# EAGLE board femtoBeacon_dongle_r2.0.3_PANELIZED (EAGLE 7.6.0)
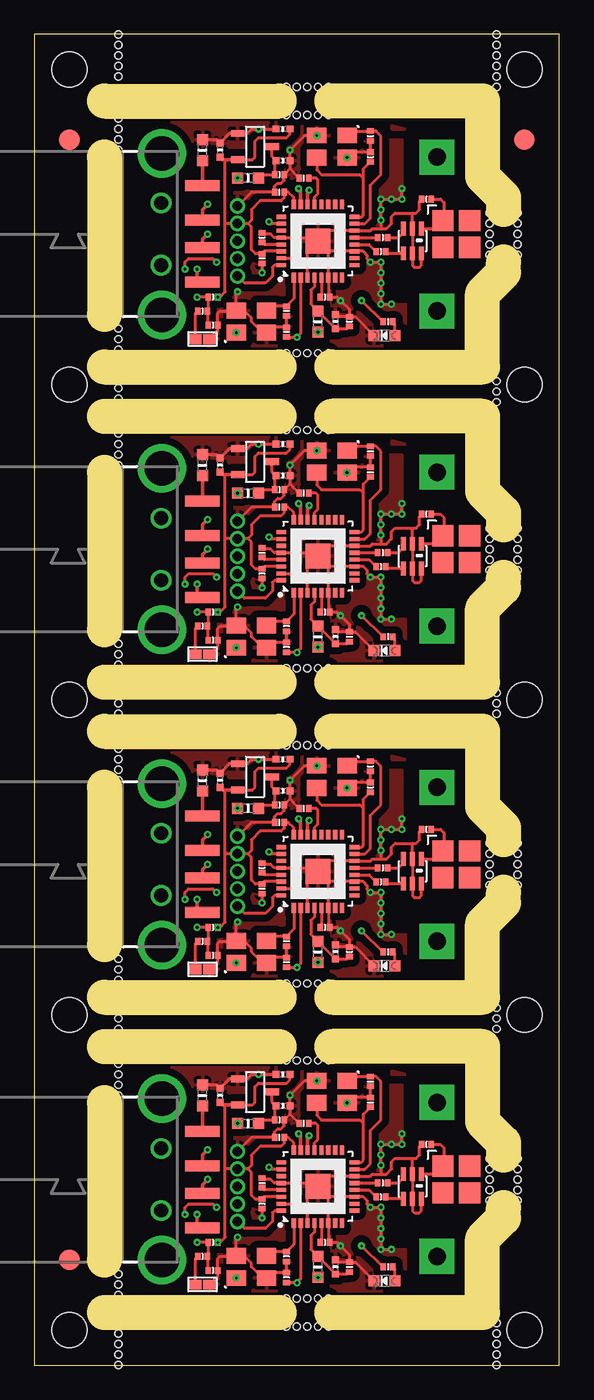
[diagram p0: board, top side]
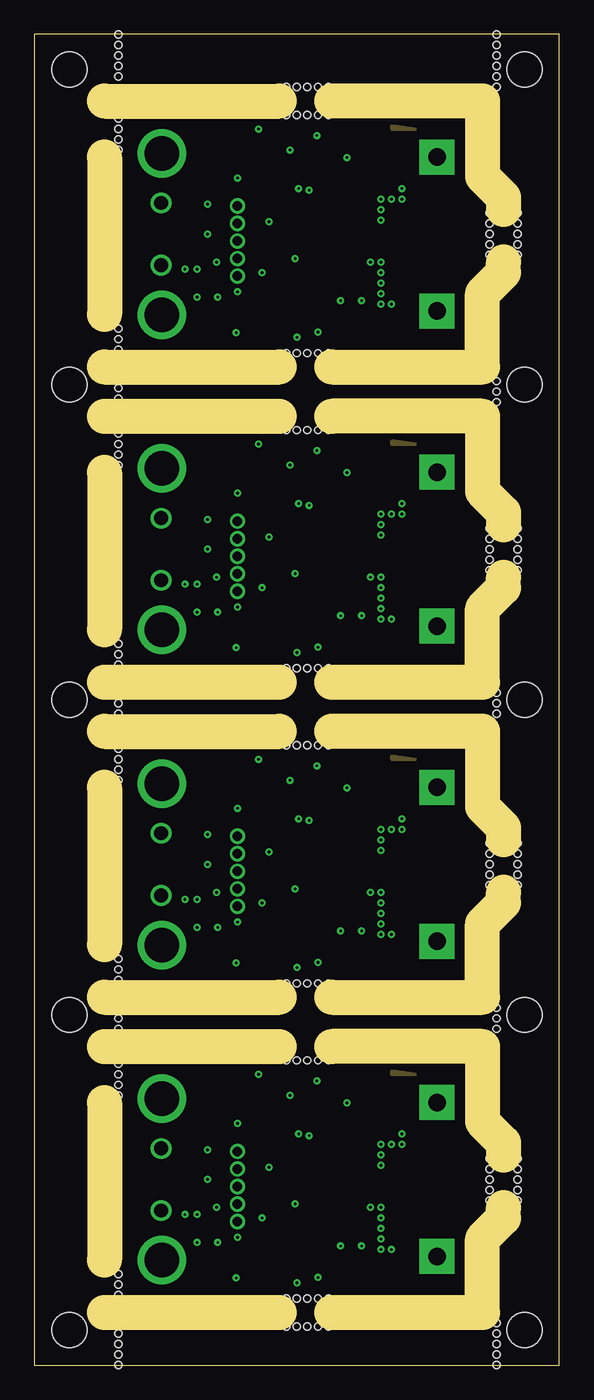
[diagram p1: board, inner layer Route2]
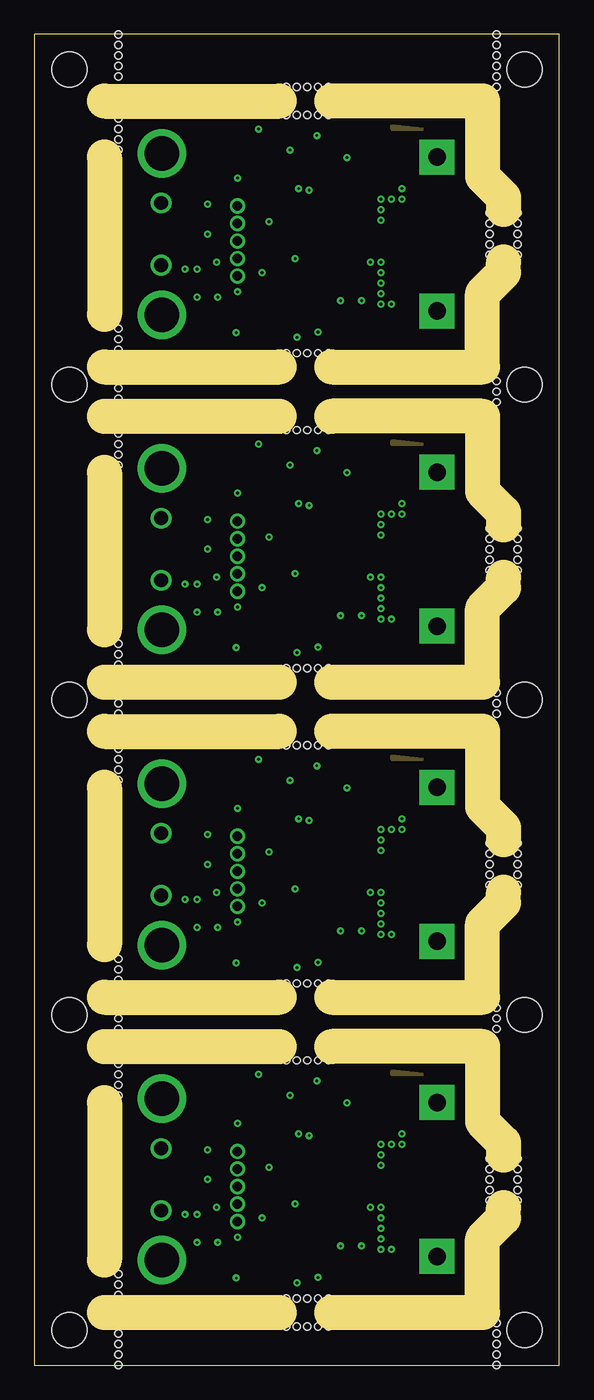
[diagram p2: board, inner layer Route15]
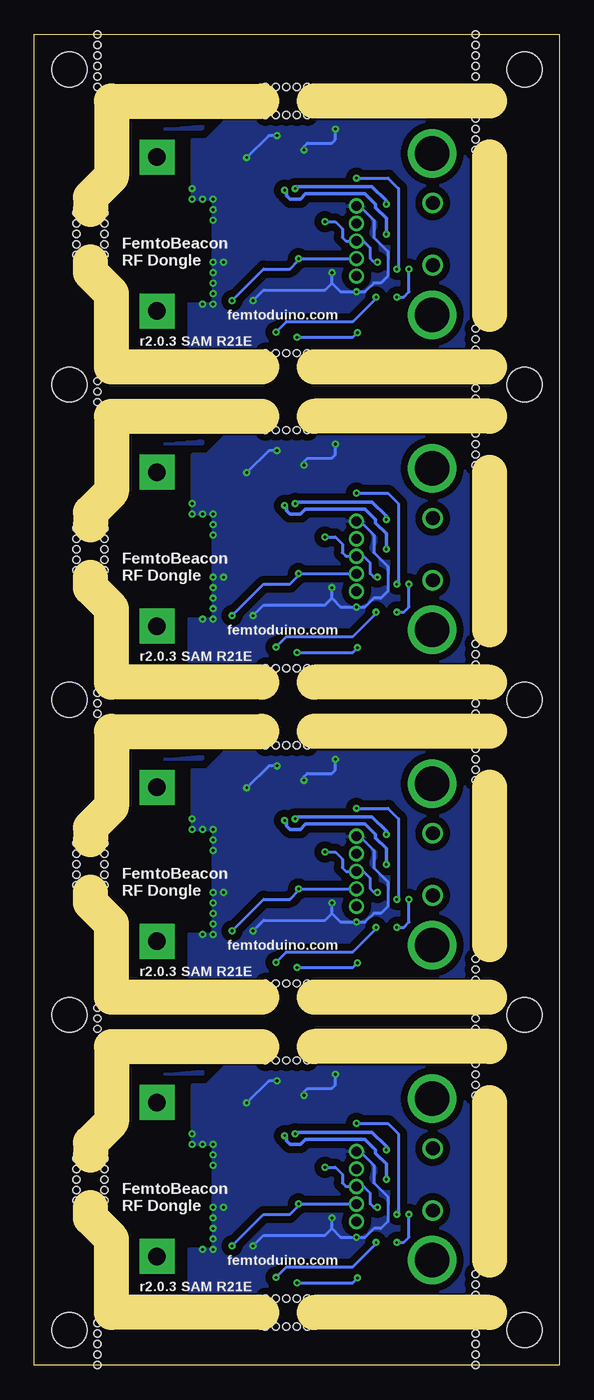
[diagram p3: board, bottom side, seen from below]

Size 38.1 x 96.52 mm. Coordinates in mm from the lower left corner, seen from the top.
Outline: 38.1,27.94 38.1,0 0,0 0,27.94
Outline: 38.1,22.86 38.1,50.8
Outline: 0,50.8 0,22.86
Outline: 38.1,45.72 38.1,73.66
Outline: 0,73.66 0,45.72
Outline: 38.1,68.58 38.1,96.52 0,96.52 0,68.58
Copper layers (1+2*15+16): Top 0.035mm / dielectric 1.5mm / Route2 0.035mm / dielectric 0.15mm / Route15 0.035mm / dielectric 0.2mm / Bottom 0.035mm
Design rules "femtoduino_5mil_4layer": minimum track width 5mil, minimum drill 5mil, track to track 5mil, track to pad 5mil, pad to pad 5mil, via to via 5mil, smd to smd 5mil, copper to edge 5mil, drill to drill 5mil, minimum pad ring 8mil, minimum via ring 5mil, stop-mask expansion 2mil, vias tented up to drill 30mil, thermal gap 10mil
Holes 2.54 mm at 2.54,2.54 2.54,25.4 35.56,25.4 35.56,2.54 2.54,25.4 2.54,48.26 35.56,48.26 35.56,25.4 2.54,48.26 2.54,71.12 35.56,71.12 35.56,48.26 2.54,71.12 2.54,93.98 35.56,93.98 35.56,71.12
Holes 0.51 mm at 6.1,21.84 6.1,21.08 6.1,20.32 6.1,19.56 6.1,5.08 6.1,5.84 6.1,6.6 19.81,4.83 19.05,4.83 18.29,4.83 20.57,4.83 21.34,4.83 33.02,13.46 33.02,14.22 33.02,14.99 33.02,12.7 33.02,11.94 35.05,13.46 35.05,14.22 35.05,12.7 35.05,11.94 35.05,14.99 19.81,2.79 19.05,2.79 18.29,2.79 20.57,2.79 21.34,2.79 19.81,22.1 19.05,22.1 18.29,22.1 20.57,22.1 21.34,22.1 33.53,3.05 33.53,0 33.53,0.76 33.53,1.52 33.53,2.29 6.1,27.94 6.1,0 6.1,0.76 6.1,1.52 6.1,2.29 6.1,44.7 6.1,43.94 6.1,43.18 6.1,42.42 6.1,27.94 6.1,28.7 6.1,29.46 19.81,27.69 19.05,27.69 18.29,27.69 20.57,27.69 21.34,27.69 33.02,36.32 33.02,37.08 33.02,37.85 33.02,35.56 33.02,34.8 35.05,36.32 35.05,37.08 35.05,35.56 35.05,34.8 35.05,37.85 19.81,44.96 19.05,44.96 18.29,44.96 20.57,44.96 21.34,44.96 33.53,25.91 33.53,24.38 33.53,25.15 6.1,50.8 6.1,24.38 6.1,25.15 6.1,67.56 6.1,66.8 6.1,66.04 6.1,65.28 6.1,50.8 6.1,51.56 6.1,52.32 19.81,50.55 19.05,50.55 18.29,50.55 20.57,50.55 21.34,50.55 33.02,59.18 33.02,59.94 33.02,60.71 33.02,58.42 33.02,57.66 35.05,59.18 35.05,59.94 35.05,58.42 35.05,57.66 35.05,60.71 19.81,67.82 19.05,67.82 18.29,67.82 20.57,67.82 21.34,67.82 33.53,69.85 33.53,70.61 33.53,71.37 33.53,48.77 33.53,47.24 33.53,48.01 6.1,73.66 6.1,47.24 6.1,48.01 6.1,90.42 6.1,89.66 6.1,88.9 6.1,88.14 6.1,73.66 6.1,74.42 6.1,75.18 19.81,73.41 19.05,73.41 18.29,73.41 20.57,73.41 21.34,73.41 33.02,82.04 33.02,82.8 33.02,83.57 33.02,81.28 33.02,80.52 35.05,82.04 35.05,82.8 35.05,81.28 35.05,80.52 35.05,83.57 19.81,90.68 19.05,90.68 18.29,90.68 20.57,90.68 21.34,90.68 19.81,92.71 19.05,92.71 18.29,92.71 20.57,92.71 21.34,92.71 33.53,92.71 33.53,93.47 33.53,94.23 33.53,95 33.53,95.76 33.53,96.52 6.1,93.47 6.1,94.23 6.1,95 6.1,95.76 6.1,96.52 6.1,70.1 6.1,70.87
Milling: 44 lines

## Footprints (pad centres in the part's own frame; a part is rotated, then mirrored left to right if it is on the bottom)
SPST_SMD = smd 0.889 x 0.699: 1 -0.508,0; 2 0.508,0
PART = smd 0.4 x 0.5: 1 -0.35,0; 2 0.35,0
_0402MP = smd 0.5 x 0.5: 1 -0.508,0; 2 0.508,0
USB_A-SMT = drill 2.5 pad 3.302: D1 -5.85,2.958; D2 5.85,2.958 | drill 1: D3 -2.25,3; D4 2.25,3 | smd 0.8 x 2.5: D+ 1,0; D- -1,0; GND 3.5,0; VBUS -3.5,0
_0603MP = smd 0.8 x 0.8: 1 -0.762,0; 2 0.762,0
FIDUCIAL_1MM = smd 1.5 x 1.5: 1 0,0
MCP1700T-3302E/TT = smd 0.5 x 1: GND -0.95,-1.25; VIN 0,1.25; VOUT 0.95,-1.25
CHIPLED_0603_NOOUTLINE = smd 0.8 x 0.8: A 0,-0.75; C 0,0.75
1X5_ROUND = drill 0.7 pad 1: P$1 0,0; P$2 0,-1.27; P$3 0,-2.54; P$4 0,-3.81; P$5 0,-5.08
0805_BALUN = smd 1 x 0.35: 1 -0.9,0.65; 2 -0.9,0; 3 -0.9,-0.65; 4 0.9,-0.65; 5 0.9,0; 6 0.9,0.65
QFN32 = smd 0.7 x 0.3: 1 -2.65,1.75; 2 -2.65,1.25; 3 -2.65,0.75; 4 -2.65,0.25; 5 -2.65,-0.25; 6 -2.65,-0.75; 7 -2.65,-1.25; 8 -2.65,-1.75; 17 2.65,-1.75; 18 2.65,-1.25; 19 2.65,-0.75; 20 2.65,-0.25; 21 2.65,0.25; 22 2.65,0.75; 23 2.65,1.25; 24 2.65,1.75 | smd 0.3 x 0.7: 9 -1.75,-2.65; 10 -1.25,-2.65; 11 -0.75,-2.65; 12 -0.25,-2.65; 13 0.25,-2.65; 14 0.75,-2.65; 15 1.25,-2.65; 16 1.75,-2.65; 25 1.75,2.65; 26 1.25,2.65; 27 0.75,2.65; 28 0.25,2.65; 29 -0.25,2.65; 30 -0.75,2.65; 31 -1.25,2.65; 32 -1.75,2.65 | smd 1.8 x 1.8: 33 0,0
0479480001 = smd 1.54 x 1.54: ANT -0.963,0.963; NC1 0.978,0.963; NC2 0.978,-0.978; NC3 -0.963,-0.978
TSX-3225 = smd 1.4 x 1.15: 1 -1.1,-0.8; 2 1.1,-0.8; 3 1.1,0.8; 4 -1.1,0.8

## Placement (x,y rotation side)
BTN  DNP  [SPST_SMD]  12.19,5.84 0 top
BTN1  DNP  [SPST_SMD]  12.19,28.7 0 top
BTN2  DNP  [SPST_SMD]  12.19,51.56 0 top
BTN3  DNP  [SPST_SMD]  12.19,74.42 0 top
C1  0.1uF  [PART]  12.95,6.86 0 top
C2  0.1uF  [PART]  19.56,17.53 180 top
C3  10pF  [PART]  24.38,20.57 90 top
C4  10pF  [PART]  24.38,19.05 90 top
C5  2.2uF  [_0402MP]  18.03,21.08 180 top
C6  2.2uF  [_0402MP]  18.03,18.8 0 top
C7  0.47uF  [PART]  17.78,17.78 0 top
C8  0.1uF  [PART]  22.86,7.11 90 top
C9  0.1uF  [PART]  16.51,13.21 90 top
C10  0.1uF  [PART]  17.78,16.51 180 top
C11  22pF, C0G, 5%  [PART]  25.27,13.21 0 top
C12  22pF, C0G, 5%  [PART]  25.15,12.19 0 top
C13  DNP  [PART]  28.45,16 180 top
C14  9pF  [PART]  18.29,6.35 270 top
C15  9pF  [PART]  18.29,7.87 270 top
C16  0.1uF  [PART]  16.51,11.68 270 top
C17  0.1uF  [PART]  21.08,8.89 0 top
C18  0.1uF  [PART]  12.95,29.72 0 top
C19  0.1uF  [PART]  17.78,39.37 180 top
C20  22pF, C0G, 5%  [PART]  25.27,36.07 0 top
C21  10uF  [_0402MP]  13.46,19.56 270 top
C22  10uF  [_0402MP]  21.84,7.11 270 top
C23  22pF, C0G, 5%  [PART]  25.15,35.05 0 top
C24  DNP  [PART]  28.45,38.86 180 top
C25  9pF  [PART]  18.29,29.21 270 top
C26  9pF  [PART]  18.29,30.73 270 top
C27  0.1uF  [PART]  16.51,34.54 270 top
C28  0.1uF  [PART]  21.08,31.75 0 top
C29  0.1uF  [PART]  19.56,40.39 180 top
C30  10uF  [_0402MP]  13.46,42.42 270 top
C31  10uF  [_0402MP]  21.84,29.97 270 top
C32  10pF  [PART]  24.38,43.43 90 top
C33  10pF  [PART]  24.38,41.91 90 top
C34  2.2uF  [_0402MP]  18.03,43.94 180 top
C35  2.2uF  [_0402MP]  18.03,41.66 0 top
C36  0.47uF  [PART]  17.78,40.64 0 top
C37  0.1uF  [PART]  22.86,29.97 90 top
C38  0.1uF  [PART]  16.51,36.07 90 top
C39  0.1uF  [PART]  12.95,52.58 0 top
C40  0.1uF  [PART]  17.78,62.23 180 top
C41  22pF, C0G, 5%  [PART]  25.27,58.93 0 top
C42  22pF, C0G, 5%  [PART]  25.15,57.91 0 top
C43  DNP  [PART]  28.45,61.72 180 top
C44  9pF  [PART]  18.29,52.07 270 top
C45  9pF  [PART]  18.29,53.59 270 top
C46  0.1uF  [PART]  16.51,57.4 270 top
C47  0.1uF  [PART]  21.08,54.61 0 top
C48  0.1uF  [PART]  19.56,63.25 180 top
C49  10uF  [_0402MP]  13.46,65.28 270 top
C50  10uF  [_0402MP]  21.84,52.83 270 top
C51  10pF  [PART]  24.38,66.29 90 top
C52  10pF  [PART]  24.38,64.77 90 top
C53  2.2uF  [_0402MP]  18.03,66.8 180 top
C54  2.2uF  [_0402MP]  18.03,64.52 0 top
C55  0.47uF  [PART]  17.78,63.5 0 top
C56  0.1uF  [PART]  22.86,52.83 90 top
C57  0.1uF  [PART]  16.51,58.93 90 top
C58  0.1uF  [PART]  12.95,75.44 0 top
C59  0.1uF  [PART]  17.78,85.09 180 top
C60  22pF, C0G, 5%  [PART]  25.27,81.79 0 top
C61  22pF, C0G, 5%  [PART]  25.15,80.77 0 top
C62  DNP  [PART]  28.45,84.58 180 top
C63  9pF  [PART]  18.29,74.93 270 top
C64  9pF  [PART]  18.29,76.45 270 top
C65  0.1uF  [PART]  16.51,80.26 270 top
C66  0.1uF  [PART]  21.08,77.47 0 top
C67  0.1uF  [PART]  19.56,86.11 180 top
C68  10uF  [_0402MP]  13.46,88.14 270 top
C69  10uF  [_0402MP]  21.84,75.69 270 top
C70  10pF  [PART]  24.38,89.15 90 top
C71  10pF  [PART]  24.38,87.63 90 top
C72  2.2uF  [_0402MP]  18.03,89.66 180 top
C73  2.2uF  [_0402MP]  18.03,87.38 0 top
C74  0.47uF  [PART]  17.78,86.36 0 top
C75  0.1uF  [PART]  22.86,75.69 90 top
C76  0.1uF  [PART]  16.51,81.79 90 top
CN1  [USB_A-SMT]  12.19,13.46 90 top
CN2  [USB_A-SMT]  12.19,36.32 90 top
CN3  [USB_A-SMT]  12.19,59.18 90 top
CN4  [USB_A-SMT]  12.19,82.04 90 top
FB1  [_0603MP]  12.19,19.56 90 top
FB2  [_0603MP]  15.49,17.53 0 top
FB3  [_0603MP]  12.19,42.42 90 top
FB4  [_0603MP]  15.49,40.39 0 top
FB5  [_0603MP]  12.19,65.28 90 top
FB6  [_0603MP]  15.49,63.25 0 top
FB7  [_0603MP]  12.19,88.14 90 top
FB8  [_0603MP]  15.49,86.11 0 top
FID1  FIDUCIAL  [FIDUCIAL_1MM]  2.54,7.62 0 top
FID2  FIDUCIAL  [FIDUCIAL_1MM]  2.54,88.9 0 top
FID3  FIDUCIAL  [FIDUCIAL_1MM]  35.56,88.9 0 top
L1  10uH  [_0603MP]  20.57,29.97 90 top
L2  10uH  [_0603MP]  20.57,52.83 90 top
L3  10uH  [_0603MP]  20.57,75.69 90 top
L6  10uH  [_0603MP]  20.57,7.11 90 top
LDO_VREG  MCP1700T-3302E/TT  [MCP1700T-3302E/TT]  16,19.81 270 top
LDO_VREG1  MCP1700T-3302E/TT  [MCP1700T-3302E/TT]  16,42.67 270 top
LDO_VREG2  MCP1700T-3302E/TT  [MCP1700T-3302E/TT]  16,65.53 270 top
LDO_VREG3  MCP1700T-3302E/TT  [MCP1700T-3302E/TT]  16,88.39 270 top
LED  BLUE  [CHIPLED_0603_NOOUTLINE]  25.4,6.1 90 top
LED1  BLUE  [CHIPLED_0603_NOOUTLINE]  25.4,28.96 90 top
LED2  BLUE  [CHIPLED_0603_NOOUTLINE]  25.4,51.82 90 top
LED3  BLUE  [CHIPLED_0603_NOOUTLINE]  25.4,74.68 90 top
R1  330  [PART]  12.19,7.87 0 top
R2  10K  [PART]  12.95,8.89 0 top
R3  330  [PART]  12.19,30.73 0 top
R4  330  [PART]  25.65,7.11 0 top
R5  10K  [PART]  12.95,31.75 0 top
R6  330  [PART]  25.65,29.97 0 top
R7  330  [PART]  12.19,53.59 0 top
R8  10K  [PART]  12.95,54.61 0 top
R9  330  [PART]  25.65,52.83 0 top
R10  330  [PART]  12.19,76.45 0 top
R11  10K  [PART]  12.95,77.47 0 top
R12  330  [PART]  25.65,75.69 0 top
U$1  1X5_ROUND  [1X5_ROUND]  14.73,15.49 0 top
U$2  JOHANSON_2450BM15A0015E  [0805_BALUN]  27.43,35.81 270 top
U$3  ATSAMR21E18A-MUT  [QFN32]  20.57,35.81 90 top
U$4  1X5_ROUND  [1X5_ROUND]  14.73,38.35 0 top
U$5  0479480001  [0479480001]  30.61,36.32 0 top
U$6  0479480001  [0479480001]  30.61,13.46 0 top
U$7  JOHANSON_2450BM15A0015E  [0805_BALUN]  27.43,58.67 270 top
U$8  ATSAMR21E18A-MUT  [QFN32]  20.57,58.67 90 top
U$9  1X5_ROUND  [1X5_ROUND]  14.73,61.21 0 top
U$10  0479480001  [0479480001]  30.61,59.18 0 top
U$11  JOHANSON_2450BM15A0015E  [0805_BALUN]  27.43,81.53 270 top
U$12  JOHANSON_2450BM15A0015E  [0805_BALUN]  27.43,12.95 270 top
U$13  ATSAMR21E18A-MUT  [QFN32]  20.57,81.53 90 top
U$14  1X5_ROUND  [1X5_ROUND]  14.73,84.07 0 top
U$15  0479480001  [0479480001]  30.61,82.04 0 top
U$76  ATSAMR21E18A-MUT  [QFN32]  20.57,12.95 90 top
XOSC  12MHz  [TSX-3225]  21.59,19.81 180 top
XOSC1  12MHz  [TSX-3225]  21.59,42.67 180 top
XOSC2  12MHz  [TSX-3225]  21.59,65.53 180 top
XOSC3  12MHz  [TSX-3225]  21.59,88.39 180 top
XOSCRF  16MHz  [TSX-3225]  15.75,7.11 0 top
XOSCRF1  16MHz  [TSX-3225]  15.75,29.97 0 top
XOSCRF2  16MHz  [TSX-3225]  15.75,52.83 0 top
XOSCRF3  16MHz  [TSX-3225]  15.75,75.69 0 top

## Library data of the parts
BTN BTN1-BTN3 = femtoduino
C1 C3 C4 C8-C20 C23-C28 C32 C33 C37-C47 C51 C52 C56-C66 C70 C71 C75 C76 = parts_0201; DIGIKEY_PART: 490-3194-1-ND
C2 C7 C29 C36 C48 C55 C67 C74 R1-R12 = parts_0201
C5 C6 C21 C22 C30 C31 C34 C35 C49 C50 C53 C54 C68 C69 C72 C73 CN1-CN4 FB1-FB8 L1-L3 L6 LED LED1-LED3 = microbuilder
FID1-FID3 = adafruit
LDO_VREG LDO_VREG1-LDO_VREG3 = MCP1700T-3302E_TT
U$1 U$4 U$9 U$14 = pins_fine_pitch
U$2 U$7 U$11 U$12 = balun
U$3 U$8 U$13 U$76 = atmel-samr21
U$5 U$6 U$10 U$15 = molex-antenna-2.4GHz
XOSC XOSC1-XOSC3 XOSCRF XOSCRF1-XOSCRF3 = crystals

## Nets
3.3V: C5.1 C10.1 C16.1 C21.2 L6.1 LDO_VREG.VOUT R2.2 U$1.P$2 U$76.24 U$76.30
3.3V1: C19.1 C27.1 C30.2 C34.1 L1.1 LDO_VREG1.VOUT R5.2 U$3.24 U$3.30 U$4.P$2
3.3V2: C40.1 C46.1 C49.2 C53.1 L2.1 LDO_VREG2.VOUT R8.2 U$8.24 U$8.30 U$9.P$2
3.3V3: C59.1 C65.1 C68.2 C72.1 L3.1 LDO_VREG3.VOUT R11.2 U$13.24 U$13.30 U$14.P$2
ANT_OUT: C13.1 U$6.ANT U$12.1
ANT_OUT1: C24.1 U$2.1 U$5.ANT
ANT_OUT2: C43.1 U$7.1 U$10.ANT
ANT_OUT3: C62.1 U$11.1 U$15.ANT
AVDD: C17.1 U$76.5
AVDD1: C28.1 U$3.5
AVDD2: C47.1 U$8.5
AVDD3: C66.1 U$13.5
DVDD: C2.1 U$76.21
DVDD1: C29.1 U$3.21
DVDD2: C48.1 U$8.21
DVDD3: C67.1 U$13.21
GND: BTN.2 C1.2 C2.2 C3.1 C4.2 C5.2 C6.2 C7.2 C8.2 C9.2 C10.2 C13.2 C14.1 C15.2 C16.2 C17.2 C21.1 C22.1 FB1.2 LDO_VREG.GND LED.C U$1.P$1 U$12.2 U$12.5 U$12.6 U$76.3 U$76.6 U$76.11 U$76.14 U$76.28 U$76.33 XOSC.2 XOSC.4 XOSCRF.2 XOSCRF.4
GND1: BTN1.2 C18.2 C19.2 C24.2 C25.1 C26.2 C27.2 C28.2 C29.2 C30.1 C31.1 C32.1 C33.2 C34.2 C35.2 C36.2 C37.2 C38.2 FB3.2 LDO_VREG1.GND LED1.C U$2.2 U$2.5 U$2.6 U$3.3 U$3.6 U$3.11 U$3.14 U$3.28 U$3.33 U$4.P$1 XOSC1.2 XOSC1.4 XOSCRF1.2 XOSCRF1.4
GND2: BTN2.2 C39.2 C40.2 C43.2 C44.1 C45.2 C46.2 C47.2 C48.2 C49.1 C50.1 C51.1 C52.2 C53.2 C54.2 C55.2 C56.2 C57.2 FB5.2 LDO_VREG2.GND LED2.C U$7.2 U$7.5 U$7.6 U$8.3 U$8.6 U$8.11 U$8.14 U$8.28 U$8.33 U$9.P$1 XOSC2.2 XOSC2.4 XOSCRF2.2 XOSCRF2.4
GND3: BTN3.2 C58.2 C59.2 C62.2 C63.1 C64.2 C65.2 C66.2 C67.2 C68.1 C69.1 C70.1 C71.2 C72.2 C73.2 C74.2 C75.2 C76.2 FB7.2 LDO_VREG3.GND LED3.C U$11.2 U$11.5 U$11.6 U$13.3 U$13.6 U$13.11 U$13.14 U$13.28 U$13.33 U$14.P$1 XOSC3.2 XOSC3.4 XOSCRF3.2 XOSCRF3.4
N$1: C11.2 U$12.3
N$2: BTN1.1 R3.1
N$3: C12.2 U$12.4
N$4: CN1.VBUS FB2.1
N$5: CN1.GND FB1.1
N$10: LED1.A R6.2
N$11: C20.2 U$2.3
N$12: C23.2 U$2.4
N$13: LED.A R4.2
N$14: CN2.GND FB3.1
N$15: CN2.VBUS FB4.1
N$20: BTN2.1 R7.1
N$21: LED2.A R9.2
N$22: C41.2 U$7.3
N$23: C42.2 U$7.4
N$24: CN3.GND FB5.1
N$25: CN3.VBUS FB6.1
N$26: BTN.1 R1.1
N$31: BTN3.1 R10.1
N$32: LED3.A R12.2
N$33: C60.2 U$11.3
N$34: C61.2 U$11.4
N$35: CN4.GND FB7.1
N$36: CN4.VBUS FB8.1
PA1: U$3.25
PA2: U$3.27
PA3: U$8.25
PA4: U$8.27
PA5: U$13.25
PA6: U$13.27
PA06/A0: U$76.7
PA06/A1: U$3.7
PA06/A2: U$8.7
PA06/A3: U$13.7
PA07/A1: U$76.8
PA07/A2: U$3.8
PA07/A3: U$8.8
PA07/A4: U$13.8
PA08/I2C/SDA: U$76.9
PA08/I2C/SDA1: U$3.9
PA08/I2C/SDA2: U$8.9
PA08/I2C/SDA3: U$13.9
PA09/I2C/SCL: U$76.10
PA09/I2C/SCL1: U$3.10
PA09/I2C/SCL2: U$8.10
PA09/I2C/SCL3: U$13.10
PA14/XIN_MC/RX: C3.2 U$76.15 XOSC.1
PA14/XIN_MC/RX1: C32.2 U$3.15 XOSC1.1
PA14/XIN_MC/RX2: C51.2 U$8.15 XOSC2.1
PA14/XIN_MC/RX3: C70.2 U$13.15 XOSC3.1
PA15/XOUT_MC/TX: C4.1 U$76.16 XOSC.3
PA15/XOUT_MC/TX1: C33.1 U$3.16 XOSC1.3
PA15/XOUT_MC/TX2: C52.1 U$8.16 XOSC2.3
PA15/XOUT_MC/TX3: C71.1 U$13.16 XOSC3.3
PA16/I2C: U$76.17
PA16/I2C1: U$3.17
PA16/I2C2: U$8.17
PA16/I2C3: U$13.17
PA17/I2C: U$76.18
PA17/I2C1: U$3.18
PA17/I2C2: U$8.18
PA17/I2C3: U$13.18
PA18/INTA: U$76.19
PA18/INTA1: U$3.19
PA18/INTA2: U$8.19
PA18/INTA3: U$13.19
PA19/FSYNC: U$76.20
PA19/FSYNC1: U$3.20
PA19/FSYNC2: U$8.20
PA19/FSYNC3: U$13.20
PA24/USBDM: CN1.D- U$76.22
PA24/USBDM1: CN2.D- U$3.22
PA24/USBDM2: CN3.D- U$8.22
PA24/USBDM3: CN4.D- U$13.22
PA25/USBDP: CN1.D+ U$76.23
PA25/USBDP1: CN2.D+ U$3.23
PA25/USBDP2: CN3.D+ U$8.23
PA25/USBDP3: CN4.D+ U$13.23
PA27: U$76.25
PA28: U$76.27
PA30/SWCLK: R4.1 U$1.P$4 U$76.31
PA30/SWCLK1: R6.1 U$3.31 U$4.P$4
PA30/SWCLK2: R9.1 U$8.31 U$9.P$4
PA30/SWCLK3: R12.1 U$13.31 U$14.P$4
PA31/SWDIO: U$1.P$5 U$76.32
PA31/SWDIO1: U$3.32 U$4.P$5
PA31/SWDIO2: U$8.32 U$9.P$5
PA31/SWDIO3: U$13.32 U$14.P$5
RESET: C1.1 R1.2 R2.1 U$1.P$3 U$76.26
RESET1: C18.1 R3.2 R5.1 U$3.26 U$4.P$3
RESET2: C39.1 R7.2 R8.1 U$8.26 U$9.P$3
RESET3: C58.1 R10.2 R11.1 U$13.26 U$14.P$3
RFN: C11.1 U$76.13
RFN1: C20.1 U$3.13
RFN2: C41.1 U$8.13
RFN3: C60.1 U$13.13
RFP: C12.1 U$76.12
RFP1: C23.1 U$3.12
RFP2: C42.1 U$8.12
RFP3: C61.1 U$13.12
VDDANA: C8.1 C22.2 L6.2 U$76.4
VDDANA1: C31.2 C37.1 L1.2 U$3.4
VDDANA2: C50.2 C56.1 L2.2 U$8.4
VDDANA3: C69.2 C75.1 L3.2 U$13.4
VDDCORE: C9.1 U$76.29
VDDCORE1: C38.1 U$3.29
VDDCORE2: C57.1 U$8.29
VDDCORE3: C76.1 U$13.29
VIN: C6.1 C7.1 FB2.2 LDO_VREG.VIN
VIN1: C35.1 C36.1 FB4.2 LDO_VREG1.VIN
VIN2: C54.1 C55.1 FB6.2 LDO_VREG2.VIN
VIN3: C73.1 C74.1 FB8.2 LDO_VREG3.VIN
XTALIN: C14.2 U$76.2 XOSCRF.1
XTALIN1: C25.2 U$3.2 XOSCRF1.1
XTALIN2: C44.2 U$8.2 XOSCRF2.1
XTALIN3: C63.2 U$13.2 XOSCRF3.1
XTALOUT: C15.1 U$76.1 XOSCRF.3
XTALOUT1: C26.1 U$3.1 XOSCRF1.3
XTALOUT2: C45.1 U$8.1 XOSCRF2.3
XTALOUT3: C64.1 U$13.1 XOSCRF3.3

## Tracks (layer width: path | path; a pad name or v marks a point on that pad's centre or on a via)
3.3V  (via drill 0.2 pad 0.51)
  Top 0.203: LDO_VREG.VOUT 15.81,18.86 16,19.05 16,20.19 16.26,20.45 18.29,20.45 18.54,20.7 C5.1 | U$76.24 18.82,16.1 18.41,16.51 C10.1 18.13,16.1 17.91,15.88 16.38,15.88 15.75,15.24 15.75,14.48 15.49,14.22 | 13.84,14.22 13.84,18.86 | 15.49,14.22 U$1.P$2 | U$76.30 16.68,12.2 C16.1 16.03,12.03 15.75,12.32 15.75,13.97 15.49,14.22 | R2.2 13.46,8.89 13.84,9.27 13.84,14.22 | 14.61,14.22 U$1.P$2 | U$1.P$2 13.84,14.22
  Top 0.254: LDO_VREG.VOUT 13.84,18.86 13.65,18.86 C21.2
  Bottom 0.203: L6.1 19.81,7.11 14.99,7.11 13.3,8.79 R2.2
  other vias: 20.57,6.35 13.3,8.89
3.3V1  (via drill 0.2 pad 0.51)
  Top 0.203: LDO_VREG1.VOUT 15.81,41.72 16,41.91 16,43.05 16.26,43.31 18.29,43.31 18.54,43.56 C34.1 | U$3.24 18.82,38.96 18.41,39.37 C19.1 18.13,38.96 17.91,38.73 16.38,38.73 15.75,38.1 15.75,37.34 15.49,37.08 | 13.84,37.08 13.84,41.72 | 15.49,37.08 U$4.P$2 | U$3.30 16.68,35.06 C27.1 16.03,34.89 15.75,35.18 15.75,36.83 15.49,37.08 | R5.2 13.46,31.75 13.84,32.13 13.84,37.08 | 14.61,37.08 U$4.P$2 | U$4.P$2 13.84,37.08
  Top 0.254: LDO_VREG1.VOUT 13.84,41.72 13.65,41.72 C30.2
  Bottom 0.203: L1.1 19.81,29.97 14.99,29.97 13.3,31.65 R5.2
  other vias: 20.57,29.21 13.3,31.75
3.3V2  (via drill 0.2 pad 0.51)
  Top 0.203: LDO_VREG2.VOUT 15.81,64.58 16,64.77 16,65.91 16.26,66.17 18.29,66.17 18.54,66.42 C53.1 | U$8.24 18.82,61.82 18.41,62.23 C40.1 18.13,61.82 17.91,61.59 16.38,61.59 15.75,60.96 15.75,60.2 15.49,59.94 | 13.84,59.94 13.84,64.58 | 15.49,59.94 U$9.P$2 | U$8.30 16.68,57.92 C46.1 16.03,57.75 15.75,58.04 15.75,59.69 15.49,59.94 | R8.2 13.46,54.61 13.84,54.99 13.84,59.94 | 14.61,59.94 U$9.P$2 | U$9.P$2 13.84,59.94
  Top 0.254: LDO_VREG2.VOUT 13.84,64.58 13.65,64.58 C49.2
  Bottom 0.203: L2.1 19.81,52.83 14.99,52.83 13.3,54.51 R8.2
  other vias: 20.57,52.07 13.3,54.61
3.3V3  (via drill 0.2 pad 0.51)
  Top 0.203: LDO_VREG3.VOUT 15.81,87.44 16,87.63 16,88.77 16.26,89.03 18.29,89.03 18.54,89.28 C72.1 | U$13.24 18.82,84.68 18.41,85.09 C59.1 18.13,84.68 17.91,84.45 16.38,84.45 15.75,83.82 15.75,83.06 15.49,82.8 | 13.84,82.8 13.84,87.44 | 15.49,82.8 U$14.P$2 | U$13.30 16.68,80.78 C65.1 16.03,80.61 15.75,80.9 15.75,82.55 15.49,82.8 | R11.2 13.46,77.47 13.84,77.85 13.84,82.8 | 14.61,82.8 U$14.P$2 | U$14.P$2 13.84,82.8
  Top 0.254: LDO_VREG3.VOUT 13.84,87.44 13.65,87.44 C68.2
  Bottom 0.203: L3.1 19.81,75.69 14.99,75.69 13.3,77.37 R11.2
  other vias: 20.57,74.93 13.3,77.47
ANT_OUT
  Top 0.203: C13.1 29.46,16 29.72,15.75 29.72,14.5 U$6.ANT 29.07,13.85 U$12.1
ANT_OUT1
  Top 0.203: C24.1 29.46,38.86 29.72,38.61 29.72,37.36 U$5.ANT 29.07,36.71 U$2.1
ANT_OUT2
  Top 0.203: C43.1 29.46,61.72 29.72,61.47 29.72,60.22 U$10.ANT 29.07,59.57 U$7.1
ANT_OUT3
  Top 0.203: C62.1 29.46,84.58 29.72,84.33 29.72,83.08 U$15.ANT 29.07,82.43 U$11.1
AVDD
  Top 0.203: U$76.5 20.82,8.98 C17.1
AVDD1
  Top 0.203: U$3.5 20.82,31.84 C28.1
AVDD2
  Top 0.203: U$8.5 20.82,54.7 C47.1
AVDD3
  Top 0.203: U$13.5 20.82,77.56 C66.1
DVDD
  Top 0.203: U$76.21 20.32,16.13 20.57,16.38 20.57,17.4 20.45,17.53 C2.1
DVDD1
  Top 0.203: U$3.21 20.32,38.99 20.57,39.24 20.57,40.26 20.45,40.39 C29.1
DVDD2
  Top 0.203: U$8.21 20.32,61.85 20.57,62.1 20.57,63.12 20.45,63.25 C48.1
DVDD3
  Top 0.203: U$13.21 20.32,84.71 20.57,84.96 20.57,85.98 20.45,86.11 C67.1
GND  (via drill 0.2 pad 0.51)
  Top 0.203: LDO_VREG.GND 15.43,20.76 15.75,21.08 v16.26,21.08 C5.2 | XOSC.2 19.6,20.61 v18.54,19.56 C6.2 18.54,18.19 | XOSC.4 23.08,19.4 C4.2 C3.1 | U$76.33 21.32,13.7 U$76.14 24.37,13.7 24.51,13.84 25.15,13.84 | 25.15,13.84 25.53,13.84 25.91,14.22 25.91,14.73 26.16,14.99 27.43,14.99 | 27.43,14.99 27.69,14.99 27.94,15.24 27.94,15.84 C13.2 | 27.43,14.99 U$12.2 U$12.5 27.43,11.18 27.56,11.05 27.94,11.05 28.08,11.19 U$12.6 | BTN.2 13.3,6.45 C1.2 13.3,7.72 13.46,7.87 14.61,7.87 XOSCRF.4 | XOSCRF.4 15.2,7.91 15.75,7.37 15.75,7.11 16.55,6.31 XOSCRF.2 17.24,6.7 C14.1 C15.2 | 21.32,12.2 U$76.6 21.32,9 C17.2 21.97,8.89 v22.23,8.64 22.86,8 C8.2 | U$76.33 20.32,13.2 U$76.28 17.4,13.2 17.14,13.46 16.61,13.46 C9.2 | 18.54,18.19 C7.2 18.13,17.37 17.91,17.14 17.65,17.14 17.43,16.92 C10.2 15.75,16.51 U$1.P$1 | C16.2 v16.51,10.67 | XOSCRF.4 14.65,9.19 v14.73,9.27 | U$76.3 19.82,12.2 U$76.33 | C8.2 22,7.46 C22.1 | C8.2 23.28,7.46 LED.C | C2.2 18.54,18.19 | v26.67,16.76 v26.67,16 v25.91,16 v25.15,16 v25.15,15.24 v25.15,14.48 25.15,13.84 | v25.91,8.38 v25.15,8.38 v25.15,9.14 v25.15,9.91 v25.15,10.67 v25.15,11.43 v24.38,11.43 24.13,11.68 24.13,11.94 23.86,12.2 U$76.11 21.32,12.2 | 21.32,12.2 U$76.33
  Top 0.254: FB1.2 13.21,20.32 C21.1 14.16,20.76 LDO_VREG.GND
  Bottom 0.203: v18.54,19.56 18.54,19.81 18.29,20.07 16.51,20.07 16.26,20.32 v16.26,21.08 | XOSC.2 21.09,20.61 XOSC.4 | v22.23,8.64 21.46,9.4 17.02,9.4 16.51,9.91 | 16.51,9.91 v16.51,10.67 | 16.51,9.91 15.88,9.27 v14.73,9.27 14.1,9.27 13.46,9.91 12.95,9.91 12.45,10.41 12.45,12.19 13.46,13.21 13.46,14.48 14.48,15.49 U$1.P$1
  other vias: 20.49,20.61 22.69,19.01
  pour Bottom (isolate 0.508): 6.6,21.59 24.38,21.59 25.65,20.32 26.67,20.32 26.67,16 25.15,16 25.15,8.38 26.92,8.38 26.92,5.33 6.6,5.33
  pour Top (isolate 0.508): 6.6,21.59 24.38,21.59 25.65,20.32 26.67,20.32 26.67,16 25.15,16 25.15,8.38 26.92,8.38 26.92,5.33 6.6,5.33
GND1  (via drill 0.2 pad 0.51)
  Top 0.203: LDO_VREG1.GND 15.43,43.62 15.75,43.94 v16.26,43.94 C34.2 | XOSC1.2 19.6,43.47 v18.54,42.42 C35.2 18.54,41.05 | XOSC1.4 23.08,42.26 C33.2 C32.1 | U$3.33 21.32,36.56 U$3.14 24.37,36.56 24.51,36.7 25.15,36.7 | 25.15,36.7 25.53,36.7 25.91,37.08 25.91,37.59 26.16,37.85 27.43,37.85 | 27.43,37.85 27.69,37.85 27.94,38.1 27.94,38.7 C24.2 | 27.43,37.85 U$2.2 U$2.5 27.43,34.04 27.56,33.91 27.94,33.91 28.08,34.05 U$2.6 | BTN1.2 13.3,29.31 C18.2 13.3,30.58 13.46,30.73 14.61,30.73 XOSCRF1.4 | XOSCRF1.4 15.2,30.77 15.75,30.23 15.75,29.97 16.55,29.17 XOSCRF1.2 17.24,29.56 C25.1 C26.2 | 21.32,35.06 U$3.6 21.32,31.86 C28.2 21.97,31.75 v22.23,31.5 22.86,30.86 C37.2 | U$3.33 20.32,36.06 U$3.28 17.4,36.06 17.14,36.32 16.61,36.32 C38.2 | 18.54,41.05 C36.2 18.13,40.23 17.91,40.01 17.65,40.01 17.43,39.78 C19.2 15.75,39.37 U$4.P$1 | C27.2 v16.51,33.53 | XOSCRF1.4 14.65,32.05 v14.73,32.13 | U$3.3 19.82,35.06 U$3.33 | C37.2 22,30.32 C31.1 | C37.2 23.28,30.32 LED1.C | C29.2 18.54,41.05 | v26.67,39.62 v26.67,38.86 v25.91,38.86 v25.15,38.86 v25.15,38.1 v25.15,37.34 25.15,36.7 | v25.91,31.24 v25.15,31.24 v25.15,32 v25.15,32.77 v25.15,33.53 v25.15,34.29 v24.38,34.29 24.13,34.54 24.13,34.8 23.86,35.06 U$3.11 21.32,35.06 | 21.32,35.06 U$3.33
  Top 0.254: FB3.2 13.21,43.18 C30.1 14.16,43.62 LDO_VREG1.GND
  Bottom 0.203: v18.54,42.42 18.54,42.67 18.29,42.93 16.51,42.93 16.26,43.18 v16.26,43.94 | XOSC1.2 21.09,43.47 XOSC1.4 | v22.23,31.5 21.46,32.26 17.02,32.26 16.51,32.77 | 16.51,32.77 v16.51,33.53 | 16.51,32.77 15.88,32.13 v14.73,32.13 14.1,32.13 13.46,32.77 12.95,32.77 12.45,33.27 12.45,35.05 13.46,36.07 13.46,37.34 14.48,38.35 U$4.P$1
  other vias: 20.49,43.47 22.69,41.87
  pour Bottom (isolate 0.508): 6.6,44.45 24.38,44.45 25.65,43.18 26.67,43.18 26.67,38.86 25.15,38.86 25.15,31.24 26.92,31.24 26.92,28.19 6.6,28.19
  pour Top (isolate 0.508): 6.6,44.45 24.38,44.45 25.65,43.18 26.67,43.18 26.67,38.86 25.15,38.86 25.15,31.24 26.92,31.24 26.92,28.19 6.6,28.19
GND2  (via drill 0.2 pad 0.51)
  Top 0.203: LDO_VREG2.GND 15.43,66.48 15.75,66.8 v16.26,66.8 C53.2 | XOSC2.2 19.6,66.33 v18.54,65.28 C54.2 18.54,63.91 | XOSC2.4 23.08,65.12 C52.2 C51.1 | U$8.33 21.32,59.42 U$8.14 24.37,59.42 24.51,59.56 25.15,59.56 | 25.15,59.56 25.53,59.56 25.91,59.94 25.91,60.45 26.16,60.71 27.43,60.71 | 27.43,60.71 27.69,60.71 27.94,60.96 27.94,61.56 C43.2 | 27.43,60.71 U$7.2 U$7.5 27.43,56.9 27.56,56.77 27.94,56.77 28.08,56.91 U$7.6 | BTN2.2 13.3,52.17 C39.2 13.3,53.44 13.46,53.59 14.61,53.59 XOSCRF2.4 | XOSCRF2.4 15.2,53.63 15.75,53.09 15.75,52.83 16.55,52.03 XOSCRF2.2 17.24,52.42 C44.1 C45.2 | 21.32,57.92 U$8.6 21.32,54.72 C47.2 21.97,54.61 v22.23,54.36 22.86,53.72 C56.2 | U$8.33 20.32,58.92 U$8.28 17.4,58.92 17.14,59.18 16.61,59.18 C57.2 | 18.54,63.91 C55.2 18.13,63.09 17.91,62.87 17.65,62.87 17.43,62.64 C40.2 15.75,62.23 U$9.P$1 | C46.2 v16.51,56.39 | XOSCRF2.4 14.65,54.91 v14.73,54.99 | U$8.3 19.82,57.92 U$8.33 | C56.2 22,53.18 C50.1 | C56.2 23.28,53.18 LED2.C | C48.2 18.54,63.91 | v26.67,62.48 v26.67,61.72 v25.91,61.72 v25.15,61.72 v25.15,60.96 v25.15,60.2 25.15,59.56 | v25.91,54.1 v25.15,54.1 v25.15,54.86 v25.15,55.63 v25.15,56.39 v25.15,57.15 v24.38,57.15 24.13,57.4 24.13,57.66 23.86,57.92 U$8.11 21.32,57.92 | 21.32,57.92 U$8.33
  Top 0.254: FB5.2 13.21,66.04 C49.1 14.16,66.48 LDO_VREG2.GND
  Bottom 0.203: v18.54,65.28 18.54,65.53 18.29,65.79 16.51,65.79 16.26,66.04 v16.26,66.8 | XOSC2.2 21.09,66.33 XOSC2.4 | v22.23,54.36 21.46,55.12 17.02,55.12 16.51,55.63 | 16.51,55.63 v16.51,56.39 | 16.51,55.63 15.88,54.99 v14.73,54.99 14.1,54.99 13.46,55.63 12.95,55.63 12.45,56.13 12.45,57.91 13.46,58.93 13.46,60.2 14.48,61.21 U$9.P$1
  other vias: 20.49,66.33 22.69,64.73
  pour Bottom (isolate 0.508): 6.6,67.31 24.38,67.31 25.65,66.04 26.67,66.04 26.67,61.72 25.15,61.72 25.15,54.1 26.92,54.1 26.92,51.05 6.6,51.05
  pour Top (isolate 0.508): 6.6,67.31 24.38,67.31 25.65,66.04 26.67,66.04 26.67,61.72 25.15,61.72 25.15,54.1 26.92,54.1 26.92,51.05 6.6,51.05
GND3  (via drill 0.2 pad 0.51)
  Top 0.203: LDO_VREG3.GND 15.43,89.34 15.75,89.66 v16.26,89.66 C72.2 | XOSC3.2 19.6,89.19 v18.54,88.14 C73.2 18.54,86.77 | XOSC3.4 23.08,87.98 C71.2 C70.1 | U$13.33 21.32,82.28 U$13.14 24.37,82.28 24.51,82.42 25.15,82.42 | 25.15,82.42 25.53,82.42 25.91,82.8 25.91,83.31 26.16,83.57 27.43,83.57 | 27.43,83.57 27.69,83.57 27.94,83.82 27.94,84.42 C62.2 | 27.43,83.57 U$11.2 U$11.5 27.43,79.76 27.56,79.63 27.94,79.63 28.08,79.77 U$11.6 | BTN3.2 13.3,75.03 C58.2 13.3,76.3 13.46,76.45 14.61,76.45 XOSCRF3.4 | XOSCRF3.4 15.2,76.49 15.75,75.95 15.75,75.69 16.55,74.89 XOSCRF3.2 17.24,75.28 C63.1 C64.2 | 21.32,80.78 U$13.6 21.32,77.58 C66.2 21.97,77.47 v22.23,77.22 22.86,76.58 C75.2 | U$13.33 20.32,81.78 U$13.28 17.4,81.78 17.14,82.04 16.61,82.04 C76.2 | 18.54,86.77 C74.2 18.13,85.95 17.91,85.72 17.65,85.72 17.43,85.5 C59.2 15.75,85.09 U$14.P$1 | C65.2 v16.51,79.25 | XOSCRF3.4 14.65,77.77 v14.73,77.85 | U$13.3 19.82,80.78 U$13.33 | C75.2 22,76.04 C69.1 | C75.2 23.28,76.04 LED3.C | C67.2 18.54,86.77 | v26.67,85.34 v26.67,84.58 v25.91,84.58 v25.15,84.58 v25.15,83.82 v25.15,83.06 25.15,82.42 | v25.91,76.96 v25.15,76.96 v25.15,77.72 v25.15,78.49 v25.15,79.25 v25.15,80.01 v24.38,80.01 24.13,80.26 24.13,80.52 23.86,80.78 U$13.11 21.32,80.78 | 21.32,80.78 U$13.33
  Top 0.254: FB7.2 13.21,88.9 C68.1 14.16,89.34 LDO_VREG3.GND
  Bottom 0.203: v18.54,88.14 18.54,88.39 18.29,88.65 16.51,88.65 16.26,88.9 v16.26,89.66 | XOSC3.2 21.09,89.19 XOSC3.4 | v22.23,77.22 21.46,77.98 17.02,77.98 16.51,78.49 | 16.51,78.49 v16.51,79.25 | 16.51,78.49 15.88,77.85 v14.73,77.85 14.1,77.85 13.46,78.49 12.95,78.49 12.45,78.99 12.45,80.77 13.46,81.79 13.46,83.06 14.48,84.07 U$14.P$1
  other vias: 20.49,89.19 22.69,87.59
  pour Bottom (isolate 0.508): 6.6,90.17 24.38,90.17 25.65,88.9 26.67,88.9 26.67,84.58 25.15,84.58 25.15,76.96 26.92,76.96 26.92,73.91 6.6,73.91
  pour Top (isolate 0.508): 6.6,90.17 24.38,90.17 25.65,88.9 26.67,88.9 26.67,84.58 25.15,84.58 25.15,76.96 26.92,76.96 26.92,73.91 6.6,73.91
MOUNT1  (via drill 1.27 pad 2.54)
  other vias: 29.21,19.05
MOUNT2  (via drill 1.27 pad 2.54)
  other vias: 29.21,7.87
MOUNT3  (via drill 1.27 pad 2.54)
  other vias: 29.21,41.91
MOUNT4  (via drill 1.27 pad 2.54)
  other vias: 29.21,30.73
MOUNT5  (via drill 1.27 pad 2.54)
  other vias: 29.21,64.77
MOUNT6  (via drill 1.27 pad 2.54)
  other vias: 29.21,53.59
MOUNT7  (via drill 1.27 pad 2.54)
  other vias: 29.21,87.63
MOUNT8  (via drill 1.27 pad 2.54)
  other vias: 29.21,76.45
N$1
  Top 0.203: C11.2 26.42,13.21 26.78,13.57 U$12.3
N$2
  Top 0.203: BTN1.1 11.68,30.58 R3.1
N$3
  Top 0.203: U$12.4 25.63,12.05 C12.2
N$4  (via drill 0.2 pad 0.51)
  Top 0.254: CN1.VBUS 11.81,9.96 v11.81,10.92
  Bottom 0.203: FB2.1 12.45,17.53 11.68,16.76 11.68,11.05 v11.81,10.92
  other vias: 14.73,17.53
N$5
  Top 0.254: CN1.GND FB1.1
N$6
  pour Top: 25.91,21.34 25.91,21.08 26.92,21.08
N$7
  pour Route2: 25.91,21.34 25.91,21.08 27.69,21.08
N$8
  pour Route15: 25.91,21.34 25.91,21.08 28.19,21.08
N$9
  pour Bottom: 25.91,21.34 25.91,21.08 28.7,21.08
N$10
  Top 0.203: LED1.A 26.15,29.83 R6.2
N$11
  Top 0.203: C20.2 26.42,36.07 26.78,36.43 U$2.3
N$12
  Top 0.203: U$2.4 25.63,34.91 C23.2
N$13
  Top 0.203: LED.A 26.15,6.97 R4.2
N$14
  Top 0.254: CN2.GND FB3.1
N$15  (via drill 0.2 pad 0.51)
  Top 0.254: CN2.VBUS 11.81,32.82 v11.81,33.78
  Bottom 0.203: FB4.1 12.45,40.39 11.68,39.62 11.68,33.91 v11.81,33.78
  other vias: 14.73,40.39
N$16
  pour Top: 25.91,44.2 25.91,43.94 26.92,43.94
N$17
  pour Route2: 25.91,44.2 25.91,43.94 27.69,43.94
N$18
  pour Route15: 25.91,44.2 25.91,43.94 28.19,43.94
N$19
  pour Bottom: 25.91,44.2 25.91,43.94 28.7,43.94
N$20
  Top 0.203: BTN2.1 11.68,53.44 R7.1
N$21
  Top 0.203: LED2.A 26.15,52.69 R9.2
N$22
  Top 0.203: C41.2 26.42,58.93 26.78,59.29 U$7.3
N$23
  Top 0.203: U$7.4 25.63,57.77 C42.2
N$24
  Top 0.254: CN3.GND FB5.1
N$25  (via drill 0.2 pad 0.51)
  Top 0.254: CN3.VBUS 11.81,55.68 v11.81,56.64
  Bottom 0.203: FB6.1 12.45,63.25 11.68,62.48 11.68,56.77 v11.81,56.64
  other vias: 14.73,63.25
N$26
  Top 0.203: BTN.1 11.68,7.72 R1.1
N$27
  pour Top: 25.91,67.06 25.91,66.8 26.92,66.8
N$28
  pour Route2: 25.91,67.06 25.91,66.8 27.69,66.8
N$29
  pour Route15: 25.91,67.06 25.91,66.8 28.19,66.8
N$30
  pour Bottom: 25.91,67.06 25.91,66.8 28.7,66.8
N$31
  Top 0.203: BTN3.1 11.68,76.3 R10.1
N$32
  Top 0.203: LED3.A 26.15,75.55 R12.2
N$33
  Top 0.203: C60.2 26.42,81.79 26.78,82.15 U$11.3
N$34
  Top 0.203: U$11.4 25.63,80.63 C61.2
N$35
  Top 0.254: CN4.GND FB7.1
N$36  (via drill 0.2 pad 0.51)
  Top 0.254: CN4.VBUS 11.81,78.54 v11.81,79.5
  Bottom 0.203: FB8.1 12.45,86.11 11.68,85.34 11.68,79.63 v11.81,79.5
  other vias: 14.73,86.11
N$37
  pour Top: 25.91,89.92 25.91,89.66 26.92,89.66
N$38
  pour Route2: 25.91,89.92 25.91,89.66 27.69,89.66
N$39
  pour Route15: 25.91,89.92 25.91,89.66 28.19,89.66
N$40
  pour Bottom: 25.91,89.92 25.91,89.66 28.7,89.66
PA14/XIN_MC/RX
  Top 0.203: U$76.15 23.98,14.2 24.38,14.61 24.38,17.02 25.15,17.78 25.15,20.57 24.8,20.92 C3.2 23,20.92 XOSC.1
PA14/XIN_MC/RX1
  Top 0.203: U$3.15 23.98,37.06 24.38,37.47 24.38,39.88 25.15,40.64 25.15,43.43 24.8,43.78 C32.2 23,43.78 XOSC1.1
PA14/XIN_MC/RX2
  Top 0.203: U$8.15 23.98,59.92 24.38,60.33 24.38,62.74 25.15,63.5 25.15,66.29 24.8,66.64 C51.2 23,66.64 XOSC2.1
PA14/XIN_MC/RX3
  Top 0.203: U$13.15 23.98,82.78 24.38,83.19 24.38,85.6 25.15,86.36 25.15,89.15 24.8,89.5 C70.2 23,89.5 XOSC3.1
PA15/XOUT_MC/TX
  Top 0.203: U$76.16 23.72,14.7 23.88,14.86 23.88,17.53 | 23.88,17.53 23.88,18.19 C4.1 | XOSC.3 20.49,18.12 20.83,17.78 23.62,17.78 23.88,17.53
PA15/XOUT_MC/TX1
  Top 0.203: U$3.16 23.72,37.56 23.88,37.72 23.88,40.39 | 23.88,40.39 23.88,41.05 C33.1 | XOSC1.3 20.49,40.98 20.83,40.64 23.62,40.64 23.88,40.39
PA15/XOUT_MC/TX2
  Top 0.203: U$8.16 23.72,60.42 23.88,60.58 23.88,63.25 | 23.88,63.25 23.88,63.91 C52.1 | XOSC2.3 20.49,63.84 20.83,63.5 23.62,63.5 23.88,63.25
PA15/XOUT_MC/TX3
  Top 0.203: U$13.16 23.72,83.28 23.88,83.44 23.88,86.11 | 23.88,86.11 23.88,86.77 C71.1 | XOSC3.3 20.49,86.7 20.83,86.36 23.62,86.36 23.88,86.11
PA24/USBDM  (via drill 0.2 pad 0.51)
  Top 0.254: U$76.22 19.82,16.52 v19.94,16.64 | CN1.D- 12.19,13.08 v12.57,13.46
  Bottom 0.254: v12.57,13.46 12.57,14.61 13.34,15.37 13.34,15.62 14.1,16.38 18.41,16.38 18.8,16 19.57,16 19.82,16.26 19.82,16.52 v19.94,16.64
PA24/USBDM1  (via drill 0.2 pad 0.51)
  Top 0.254: U$3.22 19.82,39.38 v19.94,39.5 | CN2.D- 12.19,35.94 v12.57,36.32
  Bottom 0.254: v12.57,36.32 12.57,37.47 13.34,38.23 13.34,38.48 14.1,39.24 18.41,39.24 18.8,38.86 19.57,38.86 19.82,39.12 19.82,39.38 v19.94,39.5
PA24/USBDM2  (via drill 0.2 pad 0.51)
  Top 0.254: U$8.22 19.82,62.24 v19.94,62.36 | CN3.D- 12.19,58.8 v12.57,59.18
  Bottom 0.254: v12.57,59.18 12.57,60.33 13.34,61.09 13.34,61.34 14.1,62.1 18.41,62.1 18.8,61.72 19.57,61.72 19.82,61.98 19.82,62.24 v19.94,62.36
PA24/USBDM3  (via drill 0.2 pad 0.51)
  Top 0.254: U$13.22 19.82,85.1 v19.94,85.22 | CN4.D- 12.19,81.66 v12.57,82.04
  Bottom 0.254: v12.57,82.04 12.57,83.19 13.34,83.95 13.34,84.2 14.1,84.96 18.41,84.96 18.8,84.58 19.57,84.58 19.82,84.84 19.82,85.1 v19.94,85.22
PA25/USBDP  (via drill 0.2 pad 0.51)
  Top 0.254: CN1.D+ 12.19,15.24 v12.57,15.62 | U$76.23 19.32,16.62 v19.18,16.76
  Bottom 0.254: v12.57,15.62 12.57,15.88 13.59,16.89 19.05,16.89 v19.18,16.76
PA25/USBDP1  (via drill 0.2 pad 0.51)
  Top 0.254: CN2.D+ 12.19,38.1 v12.57,38.48 | U$3.23 19.32,39.48 v19.18,39.62
  Bottom 0.254: v12.57,38.48 12.57,38.73 13.59,39.75 19.05,39.75 v19.18,39.62
PA25/USBDP2  (via drill 0.2 pad 0.51)
  Top 0.254: CN3.D+ 12.19,60.96 v12.57,61.34 | U$8.23 19.32,62.34 v19.18,62.48
  Bottom 0.254: v12.57,61.34 12.57,61.59 13.59,62.61 19.05,62.61 v19.18,62.48
PA25/USBDP3  (via drill 0.2 pad 0.51)
  Top 0.254: CN4.D+ 12.19,83.82 v12.57,84.2 | U$13.23 19.32,85.2 v19.18,85.34
  Bottom 0.254: v12.57,84.2 12.57,84.45 13.59,85.47 19.05,85.47 v19.18,85.34
PA30/SWCLK  (via drill 0.2 pad 0.51)
  Top 0.203: U$76.31 18.9,11.7 v18.92,11.68 | v23.75,8.64 25.27,7.11 R4.1
  Bottom 0.203: U$1.P$4 v18.92,11.68 18.92,11.56 19.56,10.92 21.46,10.92 v23.75,8.64
PA30/SWCLK1  (via drill 0.2 pad 0.51)
  Top 0.203: U$3.31 18.9,34.56 v18.92,34.54 | v23.75,31.5 25.27,29.97 R6.1
  Bottom 0.203: U$4.P$4 v18.92,34.54 18.92,34.42 19.56,33.78 21.46,33.78 v23.75,31.5
PA30/SWCLK2  (via drill 0.2 pad 0.51)
  Top 0.203: U$8.31 18.9,57.42 v18.92,57.4 | v23.75,54.36 25.27,52.83 R9.1
  Bottom 0.203: U$9.P$4 v18.92,57.4 18.92,57.28 19.56,56.64 21.46,56.64 v23.75,54.36
PA30/SWCLK3  (via drill 0.2 pad 0.51)
  Top 0.203: U$13.31 18.9,80.28 v18.92,80.26 | v23.75,77.22 25.27,75.69 R12.1
  Bottom 0.203: U$14.P$4 v18.92,80.26 18.92,80.14 19.56,79.5 21.46,79.5 v23.75,77.22
PA31/SWDIO
  Top 0.203: U$76.32 17.43,11.2 17.27,11.05 17.27,10.41 16.76,9.91 15.24,9.91 U$1.P$5
PA31/SWDIO1
  Top 0.203: U$3.32 17.43,34.06 17.27,33.91 17.27,33.27 16.76,32.77 15.24,32.77 U$4.P$5
PA31/SWDIO2
  Top 0.203: U$8.32 17.43,56.92 17.27,56.77 17.27,56.13 16.76,55.63 15.24,55.63 U$9.P$5
PA31/SWDIO3
  Top 0.203: U$13.32 17.43,79.78 17.27,79.63 17.27,78.99 16.76,78.49 15.24,78.49 U$14.P$5
RESET  (via drill 0.2 pad 0.51)
  Top 0.203: C1.1 12.6,7.81 R1.2 12.6,7.94 R2.1 v11.81,8.89 | U$76.26 17.16,14.2 v17.02,14.35 | v10.92,10.92 10.92,11.43 11.18,11.68 12.95,11.68 v13.21,11.43
  Bottom 0.203: v17.02,14.35 16.26,14.35 15.75,13.84 15.75,13.21 15.49,12.95 U$1.P$3 14.22,12.95 13.72,12.45 13.72,11.68 13.46,11.43 v13.21,11.43 | v10.92,10.92 10.92,9.27 11.3,8.89 v11.81,8.89
RESET1  (via drill 0.2 pad 0.51)
  Top 0.203: C18.1 12.6,30.67 R3.2 12.6,30.8 R5.1 v11.81,31.75 | U$3.26 17.16,37.06 v17.02,37.21 | v10.92,33.78 10.92,34.29 11.18,34.54 12.95,34.54 v13.21,34.29
  Bottom 0.203: v17.02,37.21 16.26,37.21 15.75,36.7 15.75,36.07 15.49,35.81 U$4.P$3 14.22,35.81 13.72,35.31 13.72,34.54 13.46,34.29 v13.21,34.29 | v10.92,33.78 10.92,32.13 11.3,31.75 v11.81,31.75
RESET2  (via drill 0.2 pad 0.51)
  Top 0.203: C39.1 12.6,53.53 R7.2 12.6,53.66 R8.1 v11.81,54.61 | U$8.26 17.16,59.92 v17.02,60.07 | v10.92,56.64 10.92,57.15 11.18,57.4 12.95,57.4 v13.21,57.15
  Bottom 0.203: v17.02,60.07 16.26,60.07 15.75,59.56 15.75,58.93 15.49,58.67 U$9.P$3 14.22,58.67 13.72,58.17 13.72,57.4 13.46,57.15 v13.21,57.15 | v10.92,56.64 10.92,54.99 11.3,54.61 v11.81,54.61
RESET3  (via drill 0.2 pad 0.51)
  Top 0.203: C58.1 12.6,76.39 R10.2 12.6,76.52 R11.1 v11.81,77.47 | U$13.26 17.16,82.78 v17.02,82.93 | v10.92,79.5 10.92,80.01 11.18,80.26 12.95,80.26 v13.21,80.01
  Bottom 0.203: v17.02,82.93 16.26,82.93 15.75,82.42 15.75,81.79 15.49,81.53 U$14.P$3 14.22,81.53 13.72,81.03 13.72,80.26 13.46,80.01 v13.21,80.01 | v10.92,79.5 10.92,77.85 11.3,77.47 v11.81,77.47
RFN
  Top 0.203: U$76.13 24.79,13.2 C11.1
RFN1
  Top 0.203: U$3.13 24.79,36.06 C20.1
RFN2
  Top 0.203: U$8.13 24.79,58.92 C41.1
RFN3
  Top 0.203: U$13.13 24.79,81.78 C60.1
RFP
  Top 0.203: U$76.12 24.28,12.7 C12.1
RFP1
  Top 0.203: U$3.12 24.28,35.56 C23.1
RFP2
  Top 0.203: U$8.12 24.28,58.42 C42.1
RFP3
  Top 0.203: U$13.12 24.28,81.28 C61.1
VDDANA
  Top 0.203: U$76.4 20.32,9.66 20.07,9.4 20.07,8.38 L6.2 C22.2 22.7,6.6 C8.1
VDDANA1
  Top 0.203: U$3.4 20.32,32.52 20.07,32.26 20.07,31.24 L1.2 C31.2 22.7,29.46 C37.1
VDDANA2
  Top 0.203: U$8.4 20.32,55.38 20.07,55.12 20.07,54.1 L2.2 C50.2 22.7,52.32 C56.1
VDDANA3
  Top 0.203: U$13.4 20.32,78.24 20.07,77.98 20.07,76.96 L3.2 C69.2 22.7,75.18 C75.1
VDDCORE
  Top 0.203: U$76.29 16.66,12.7 C9.1
VDDCORE1
  Top 0.203: U$3.29 16.66,35.56 C38.1
VDDCORE2
  Top 0.203: U$8.29 16.66,58.42 C57.1
VDDCORE3
  Top 0.203: U$13.29 16.66,81.28 C76.1
VIN
  Top 0.203: FB2.2 16.51,17.78 C7.1 17.43,18.7 C6.1 17.25,19.07 LDO_VREG.VIN
VIN1
  Top 0.203: FB4.2 16.51,40.64 C36.1 17.43,41.56 C35.1 17.25,41.93 LDO_VREG1.VIN
VIN2
  Top 0.203: FB6.2 16.51,63.5 C55.1 17.43,64.42 C54.1 17.25,64.79 LDO_VREG2.VIN
VIN3
  Top 0.203: FB8.2 16.51,86.36 C74.1 17.43,87.28 C73.1 17.25,87.65 LDO_VREG3.VIN
XTALIN  (via drill 0.2 pad 0.51)
  Top 0.203: C14.2 19.02,6 v19.05,5.97 19.32,6.24 U$76.2
  Bottom 0.203: v19.05,5.97 14.99,5.97 XOSCRF.1
  other vias: 14.65,6.31
XTALIN1  (via drill 0.2 pad 0.51)
  Top 0.203: C25.2 19.02,28.86 v19.05,28.83 19.32,29.1 U$3.2
  Bottom 0.203: v19.05,28.83 14.99,28.83 XOSCRF1.1
  other vias: 14.65,29.17
XTALIN2  (via drill 0.2 pad 0.51)
  Top 0.203: C44.2 19.02,51.72 v19.05,51.69 19.32,51.96 U$8.2
  Bottom 0.203: v19.05,51.69 14.99,51.69 XOSCRF2.1
  other vias: 14.65,52.03
XTALIN3  (via drill 0.2 pad 0.51)
  Top 0.203: C63.2 19.02,74.58 v19.05,74.55 19.32,74.82 U$13.2
  Bottom 0.203: v19.05,74.55 14.99,74.55 XOSCRF3.1
  other vias: 14.65,74.89
XTALOUT
  Top 0.203: XOSCRF.3 17.16,8.22 C15.1 18.82,8.76 U$76.1
XTALOUT1
  Top 0.203: XOSCRF1.3 17.16,31.08 C26.1 18.82,31.62 U$3.1
XTALOUT2
  Top 0.203: XOSCRF2.3 17.16,53.94 C45.1 18.82,54.48 U$8.1
XTALOUT3
  Top 0.203: XOSCRF3.3 17.16,76.8 C64.1 18.82,77.34 U$13.1

## Text on the board
bNames: FemtoBeacon / RF Dongle | femtoduino.com | r2.0.3 SAM R21E | FemtoBeacon / RF Dongle | femtoduino.com | r2.0.3 SAM R21E | FemtoBeacon / RF Dongle | femtoduino.com | r2.0.3 SAM R21E | FemtoBeacon / RF Dongle | femtoduino.com | r2.0.3 SAM R21E